# EAGLE board padControllerR3 (EAGLE 9.0.0)
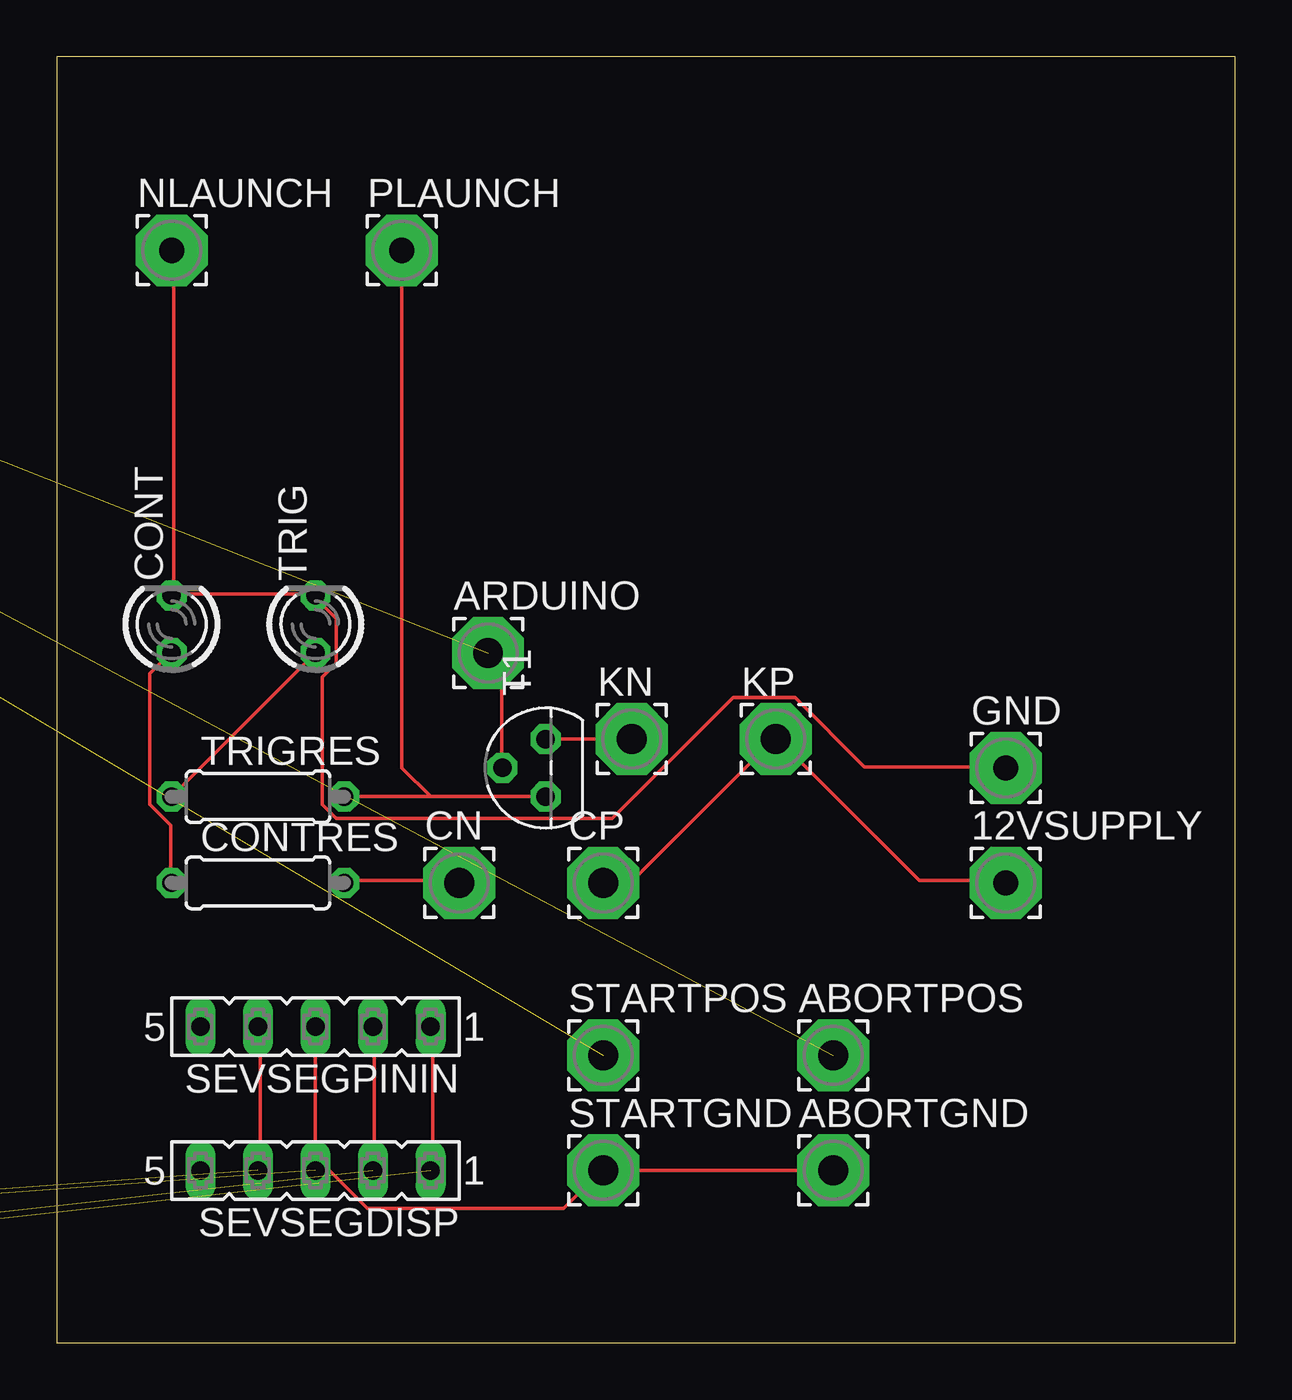
[diagram p0: board, top side]
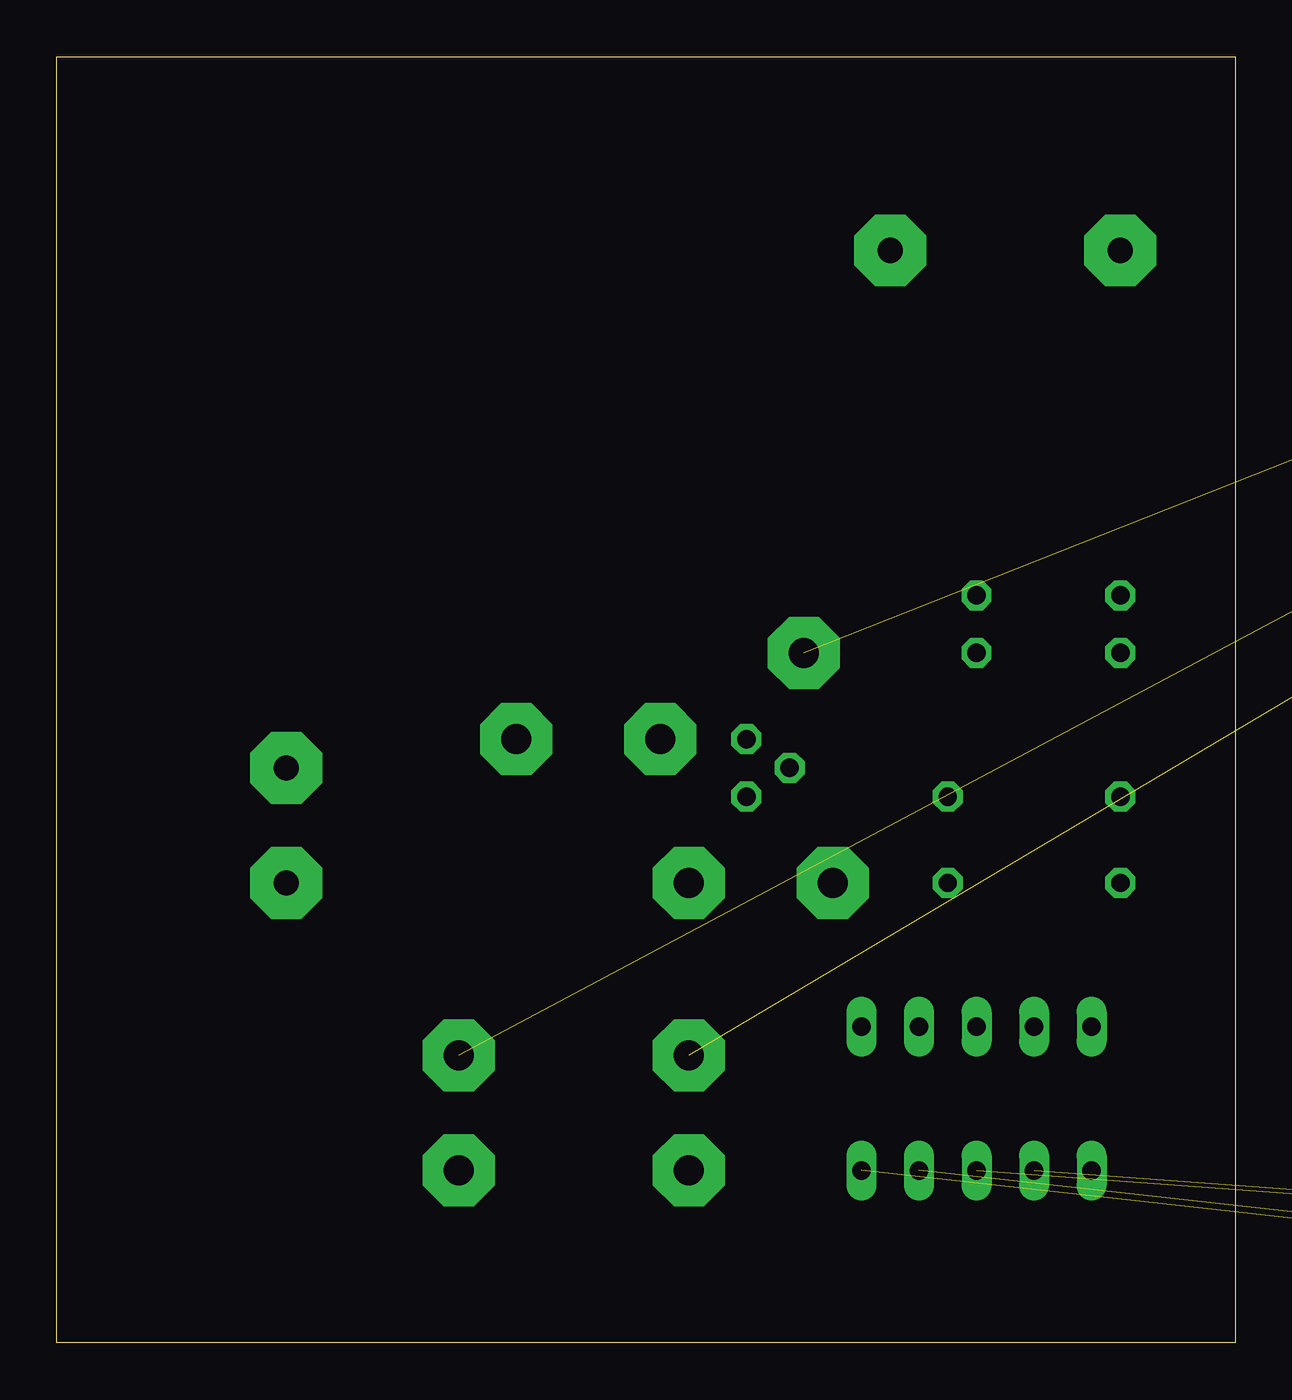
[diagram p1: board, bottom side, seen from below]

Size 52.05 x 56.82 mm. Coordinates in mm from the lower left corner, seen from the top.
Outline: 0,0 52.05,0 52.05,56.82 0,56.82 0,0
Copper layers (1*16): Top 0.035mm / dielectric 1.5mm / Bottom 0.035mm
Design rules "default": minimum track width 6mil, minimum drill 0.35mm, track to track 6mil, track to pad 6mil, pad to pad 6mil, via to via 6mil, smd to smd 6mil, copper to edge 40mil, drill to drill 6mil, minimum pad ring 10mil, minimum via ring 8mil, stop-mask expansion 4mil, vias tented up to drill 0mil, thermal gap 10mil

## Footprints (pad centres in the part's own frame; a part is rotated, then mirrored left to right if it is on the bottom)
3,17/1,1 = drill 1.118 pad 3.175 octagon: 1 0,0
3,17/1,3 = drill 1.321 pad 3.175 octagon: 1 0,0
LED3MM = drill 0.813 octagon: A -1.27,0; K 1.27,0
0207/7 = drill 0.813 octagon: 1 -3.81,0; 2 3.81,0
FE05-1 = drill 0.813 long: 1 -5.08,0; 2 -2.54,0; 3 0,0; 4 2.54,0; 5 5.08,0
TO92 = drill 0.813 octagon: 1 1.27,0; 2 0,1.905; 3 -1.27,0
ARDUINO-NOHOLE = drill 1 pad 1.676 octagon: 3V 35.56,2.54; 5V 38.1,2.54; A0 50.8,2.54; A1 53.34,2.54; A2 55.88,2.54; A3 58.42,2.54; A4 60.96,2.54; A5 63.5,2.54; AREF 23.876,50.8; D0 63.5,50.8; D1 60.96,50.8; D2 58.42,50.8; D3 55.88,50.8; D4 53.34,50.8; D5 50.8,50.8; D6 48.26,50.8; D7 45.72,50.8; D8 41.656,50.8; D9 39.116,50.8; D10 36.576,50.8; D11 34.036,50.8; D12 31.496,50.8; D13 28.956,50.8; GND 26.416,50.8; GND1 43.18,2.54; GND2 40.64,2.54; RESET 33.02,2.54; VIN 45.72,2.54

## Placement (x,y rotation side)
12VSUPPLY  [3,17/1,1]  41.91,20.32 0 top
ABORTGND  [3,17/1,3]  34.29,7.62 0 top
ABORTPOS  [3,17/1,3]  34.29,12.7 0 top
ARDUINO  [3,17/1,3]  19.05,30.48 0 top
CN  [3,17/1,3]  17.78,20.32 0 top
CONT  [LED3MM]  5.08,31.75 90 top
CONTRES  680  [0207/7]  8.89,20.32 0 top
CP  [3,17/1,3]  24.13,20.32 0 top
GND  [3,17/1,1]  41.91,25.4 0 top
KN  [3,17/1,3]  25.4,26.67 0 top
KP  [3,17/1,3]  31.75,26.67 0 top
NLAUNCH  [3,17/1,1]  5.08,48.26 0 top
PLAUNCH  [3,17/1,1]  15.24,48.26 0 top
SEVSEGDISP  [FE05-1]  11.43,7.62 180 top
SEVSEGPININ  [FE05-1]  11.43,13.97 180 top
STARTGND  [3,17/1,3]  24.13,7.62 0 top
STARTPOS  [3,17/1,3]  24.13,12.7 0 top
T1  2N3565  [TO92]  21.59,25.4 90 top
TRIG  [LED3MM]  11.43,31.75 90 top
TRIGRES  680  [0207/7]  8.89,24.13 0 top
U$1  ARDUINO-NOHOLE  [ARDUINO-NOHOLE]  -81.28,1.27 0 top  (outside the outline)

## Library data of the parts
12VSUPPLY ABORTGND ABORTPOS ARDUINO CN CP GND KN KP NLAUNCH PLAUNCH STARTGND STARTPOS = wirepad
CONT TRIG = led
CONTRES TRIGRES = resistor
SEVSEGDISP SEVSEGPININ = con-lsta; OC_FARNELL: unknown; OC_NEWARK: unknown
T1 = transistor
U$1 = adafruit

## Nets
3V: U$1.3V
GND: U$1.GND
GND1: U$1.GND1
N$1: 12VSUPPLY.1 CP.1 KP.1
N$2: KN.1 T1.1
N$3: ABORTPOS.1 U$1.D8
N$4: SEVSEGDISP.4 SEVSEGPININ.4 U$1.5V
N$6: TRIG.A TRIGRES.1
N$7: CONT.K GND.1 NLAUNCH.1 TRIG.K
N$8: CN.1 CONTRES.2
N$9: CONT.A CONTRES.1
N$12: ARDUINO.1 T1.2 U$1.D7
N$15: STARTPOS.1 U$1.D9
N$16: ABORTGND.1 SEVSEGDISP.3 SEVSEGPININ.3 STARTGND.1 U$1.GND2
N$17: SEVSEGDISP.2 SEVSEGPININ.2 U$1.A4
N$18: SEVSEGDISP.1 SEVSEGPININ.1 U$1.A5
POSITIVELINE: PLAUNCH.1 T1.3 TRIGRES.2
VIN: U$1.VIN

## Tracks (layer width: path | path; a pad name or v marks a point on that pad's centre or on a via)
N$1
  Top 0.152: CP.1 24.23,20.42 25.45,20.42 31.7,26.67 KP.1 31.85,26.67 38.1,20.42 41.91,20.42 12VSUPPLY.1
N$2
  Top 0.152: KN.1 T1.1
N$3  (1 unrouted)
N$4  (1 unrouted)
  Top 0.152: SEVSEGDISP.4 8.99,7.62 8.99,13.87 SEVSEGPININ.4
N$6
  Top 0.152: TRIG.A TRIGRES.1
N$7
  Top 0.152: 5.18,33.07 11.43,33.07 TRIG.K 11.43,32.92 12.34,32 12.34,30.02 11.73,29.41 11.73,23.77 12.34,23.16 24.54,23.16 29.87,28.5 32.61,28.5 35.66,25.45 41.91,25.45 GND.1 | 5.18,33.07 5.18,48.16 NLAUNCH.1 | 5.18,33.07 CONT.K
N$8
  Top 0.152: CONTRES.2 12.8,20.42 17.68,20.42 CN.1
N$9
  Top 0.152: CONTRES.1 5.03,20.42 5.03,22.86 4.12,23.77 4.12,29.57 5.03,30.48 CONT.A
N$12  (1 unrouted)
  Top 0.152: ARDUINO.1 19.66,29.87 19.66,25.45 T1.2
N$15  (1 unrouted)
N$16  (1 unrouted)
  Top 0.152: SEVSEGPININ.3 SEVSEGDISP.3 12.04,7.62 13.72,5.94 22.4,5.94 24.08,7.62 STARTGND.1 ABORTGND.1
N$17  (1 unrouted)
  Top 0.152: SEVSEGDISP.2 14.02,7.62 14.02,13.87 SEVSEGPININ.2
N$18  (1 unrouted)
  Top 0.152: SEVSEGDISP.1 16.61,7.62 16.61,13.87 SEVSEGPININ.1
POSITIVELINE
  Top 0.152: 12.8,24.23 TRIGRES.2 16.51,24.13 | 21.49,24.23 T1.3 16.51,24.13 | 16.51,24.13 15.24,25.4 PLAUNCH.1